# Altium PCB TPS40057 V2.0.PcbDoc
Units mil, origin at the board's own origin, x right, y up, seen from the top; angles counter-clockwise.
Board outline 1945 x 1510.79 mil, 2 copper layers (Top Layer, Bottom Layer); 29 components, 18 nets, 75 pads, 169 vias.
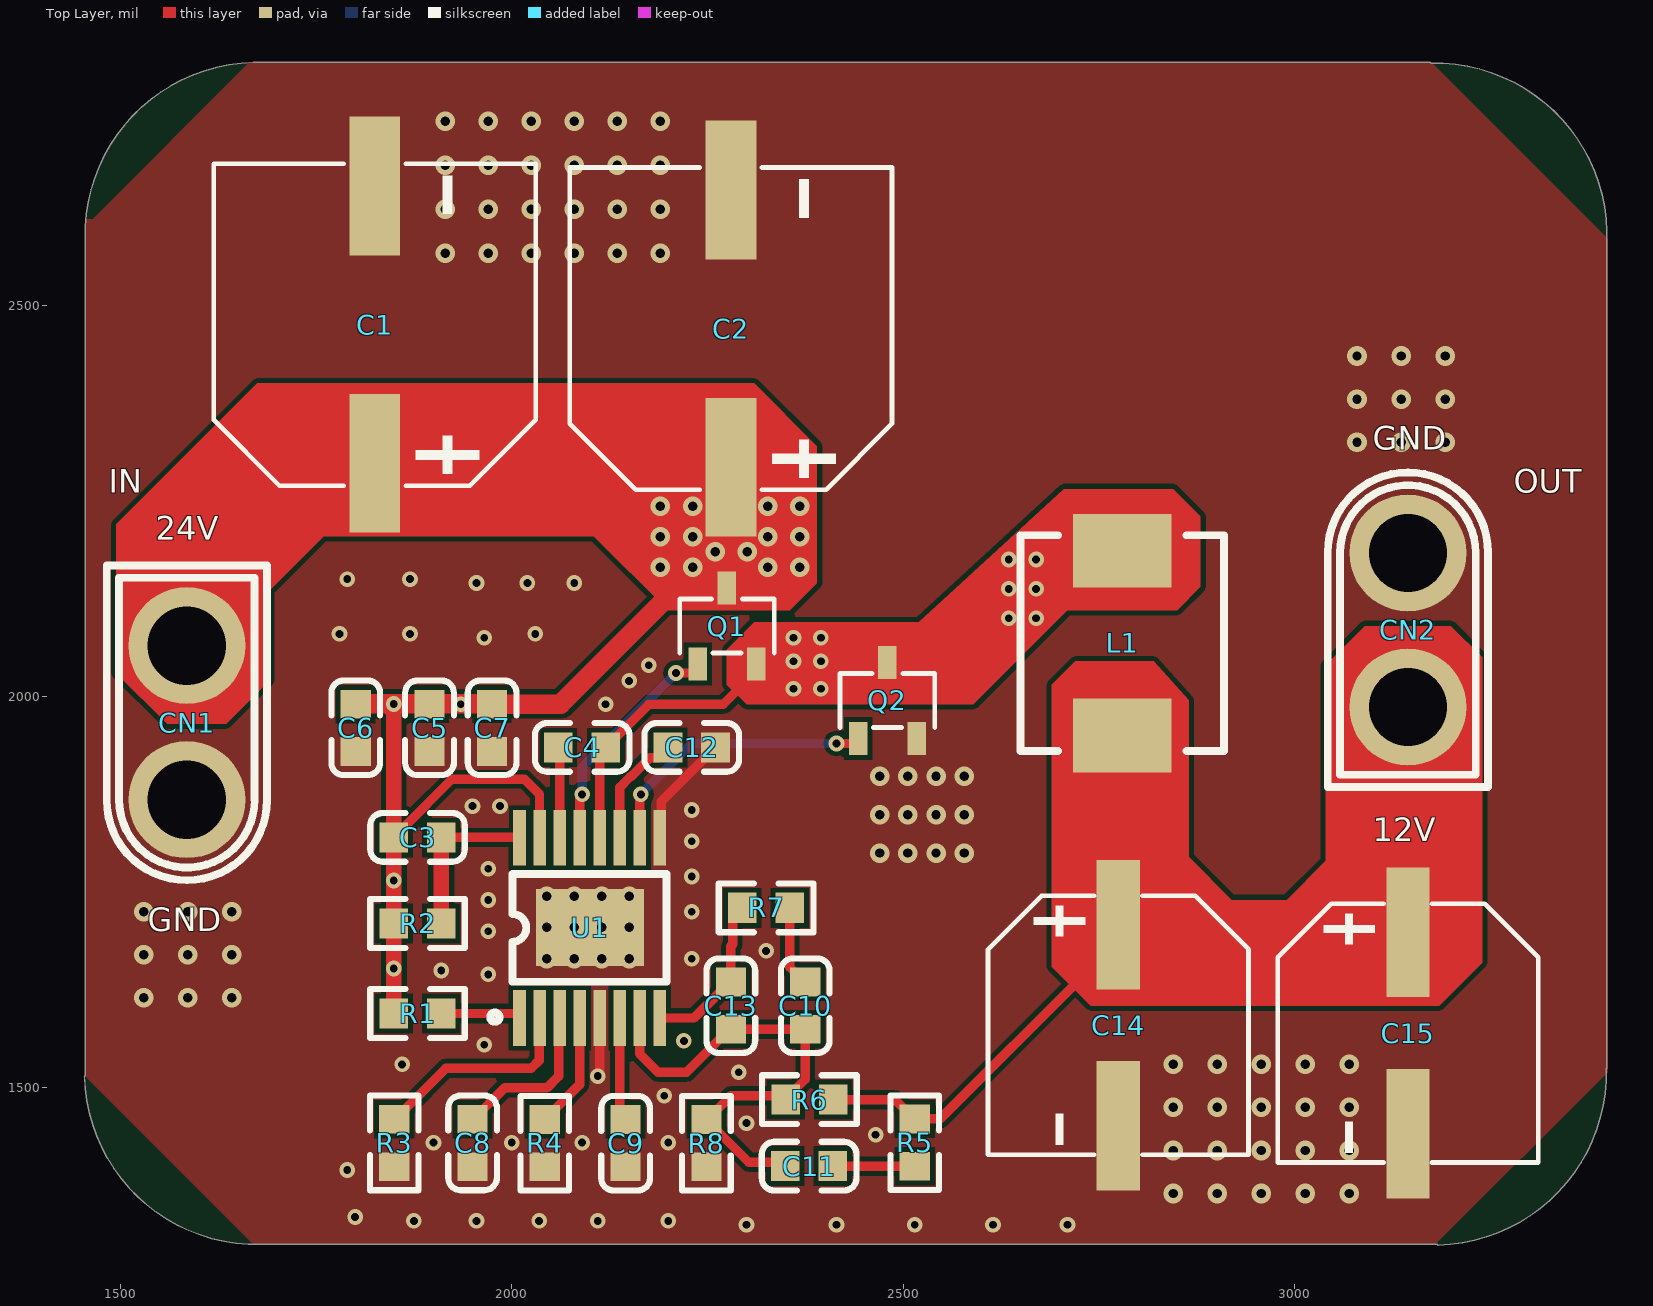
[diagram p0: Top Layer view]
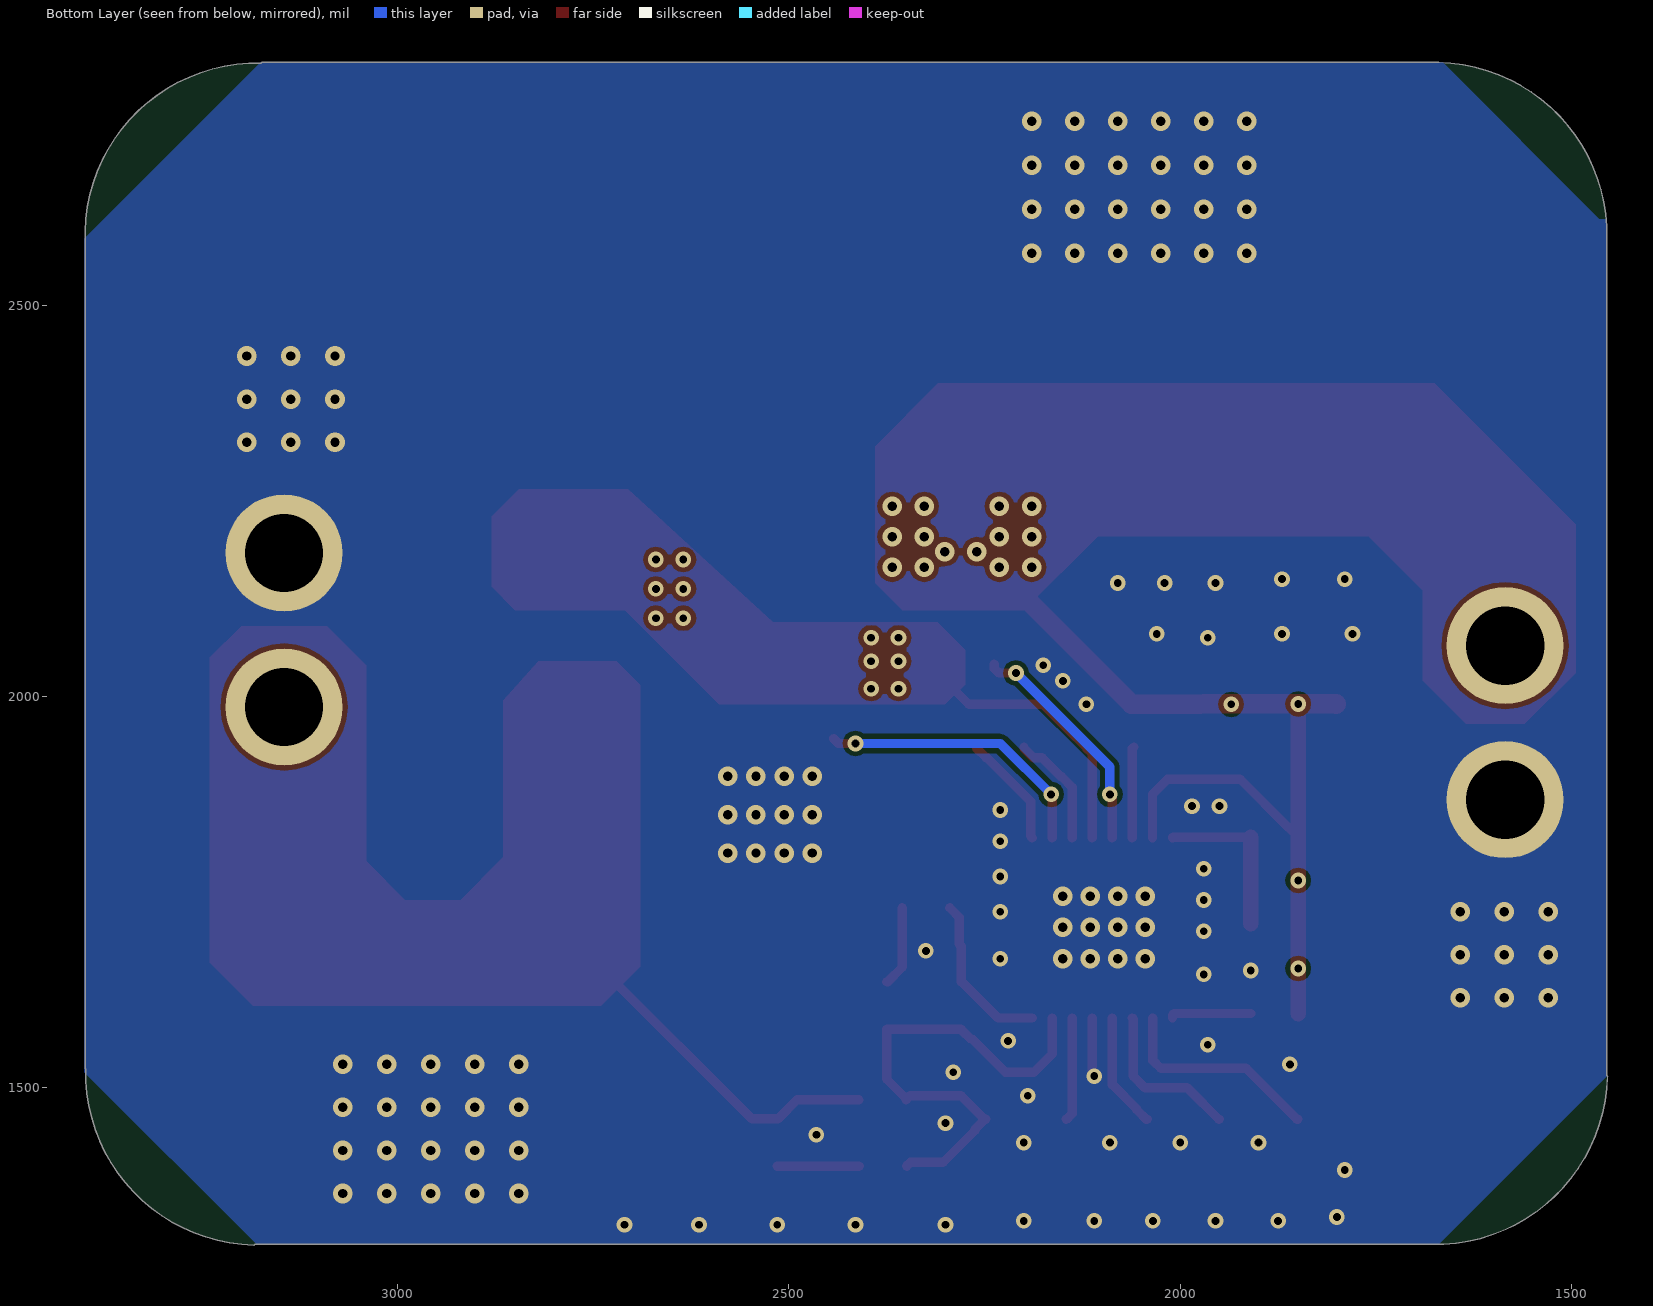
[diagram p1: Bottom Layer view, seen from below]
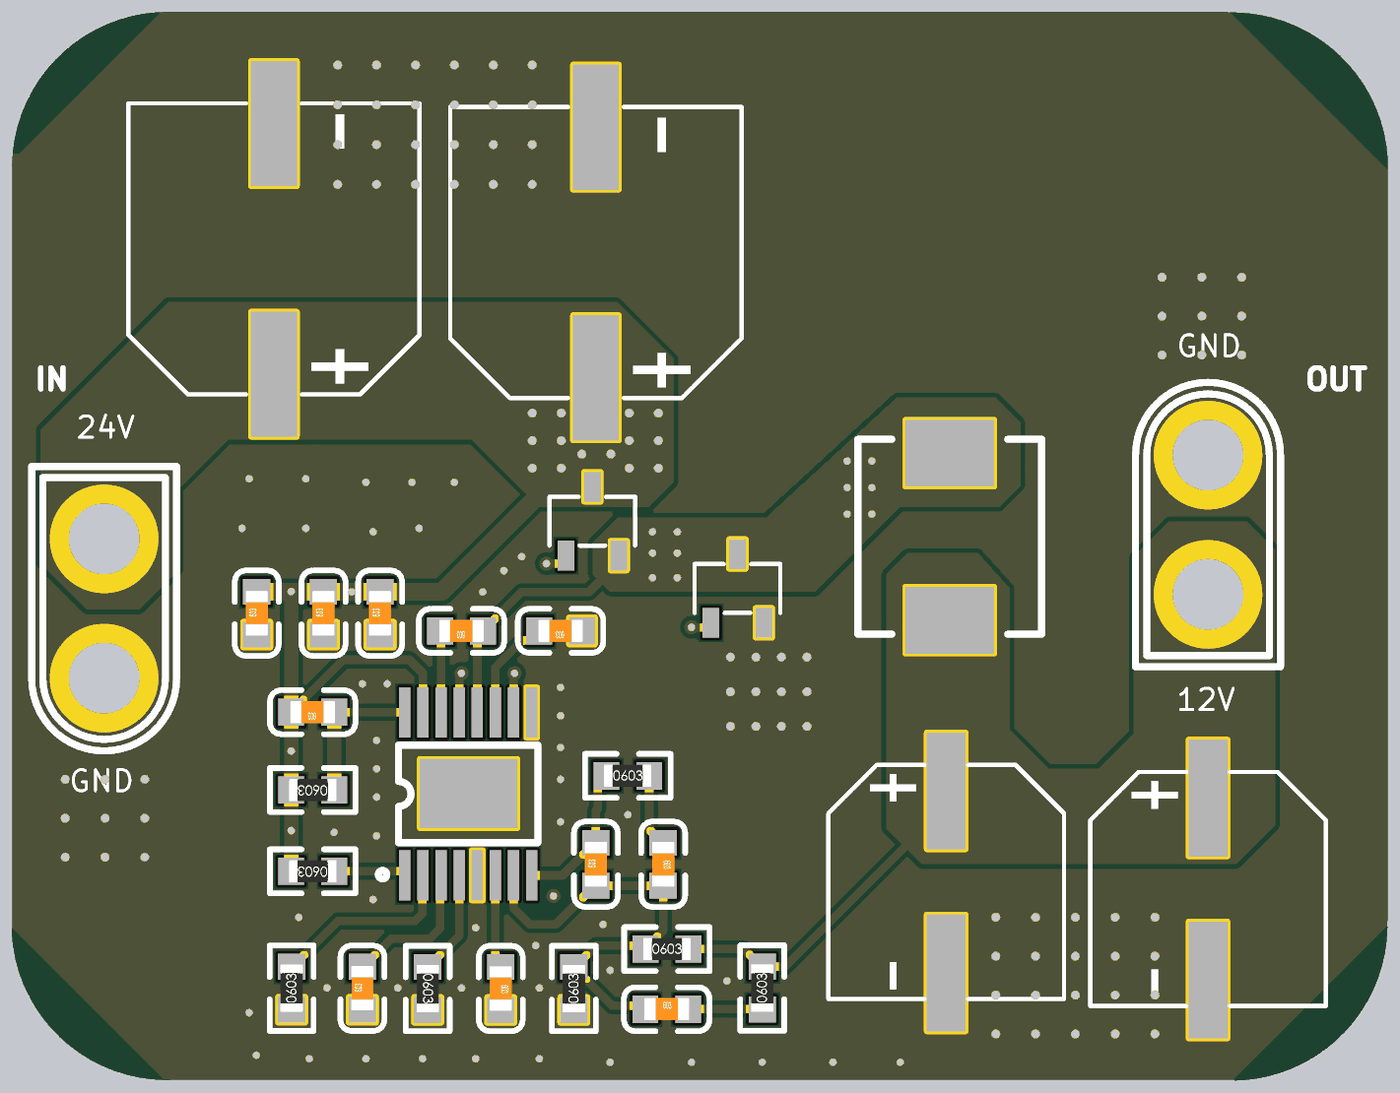
[diagram p2: 3D render of the assembled board from above, using the file's embedded part models]

## Layer stack, top to bottom
Top Solder: solder mask 0.4, Solder Resist, Dk 3.5
Top Layer: signal copper 1.4
Dielectric 1: dielectric 12.6, FR-4, Dk 4.8
Bottom Layer: signal copper 1.4
Bottom Solder: solder mask 0.4, Solder Resist, Dk 3.5

## Board outline
1455,1515.79 1455,2585 cw(c1675,2590) 1670,2810 3173.43,2810 3174.21,2809.21 cw(c3179.21,2589.21) 3399.21,2594.21 3399.21,1525 3398.43,1524.21 cw(c3178.43,1519.21) 3183.43,1299.21 3182.64,1300 1679.21,1300 cw(c1674.21,1520)

## Design rules (kind name [scope] priority, off if disabled: settings)
Clearance [All] p1: gap=6 ignorepadtopadclearanceinfootprint=FALSE
PlaneClearance [All] p1: clearance=8
PlaneConnect [All] p1: planeconnectstyle=Direct reliefexpansion=20 reliefentries=4 reliefconductorwidth=10 reliefairgap=10
PolygonConnect [All] p1: connectstyle=Direct reliefconductorwidth=10 reliefentries=4 polygonreliefangle="90 Angle" airgapwidth=10
RoutingVias [All] p1: holewidth=25 width=12 viastyle="Through Hole" minholewidth=4 minwidth=4 maxholewidth=50 maxwidth=50
SilkToSolderMaskClearance [IsPad] p1: minsilkscreentomaskgap=2 clearancetoexposedcopper=TRUE
SolderMaskExpansion [All] p1: expansion=4 istentingtop=FALSE
Width [All] p1: maxlimit=60 minlimit=6 preferedwidth=12
27 further rules are at their usual default settings.

## Components (designator, comment, footprint, x,y, rotation, side; value= is the part's Value field where it differs from the comment)
C1 "330uF (107) ±20% 35V" CAP-SMD_BD10.0-L10.3-W10.3-LS11.3-FD 1825,2475 r90 top value=330uF
C2 "330uF (107) ±20% 35V" CAP-SMD_BD10.0-L10.3-W10.3-LS11.3-FD 2280,2470 r90 top value=330uF
C3 "100pF/0603/50V" 0603_C 1879.68,1820 r180 top
C4 "0.1uF/0603/50V" 0603_C 2090,1935 r180 top
C5 "1uF/0603/ 50V" 0603_C 1895,1960 r90 top
C6 "22uF /0603/50V" 0603_C 1800.67,1960 r90 top
C7 "22uF /0603/50V" 0603_C 1975,1960 r90 top
C8 "1uF /0603/ /50V" 0603_C 1950,1429.68 r90 top
C9 "3.3uF /0603/50V" 0603_C 2145.51,1429.33 r270 top
C10 "330pF/ 0603/50V" 0603_C 2375,1605 r270 top
C11 "330pF/0603/50V" 0603_C 2380,1400 r0 top
C12 "1uF/0603/50V" 0603_C 2230,1935 r180 top
C13 "50pF/0603/50V" 0603_C 2280,1605 r90 top
C14 "180uF (107) ±20% 35V" CAP-SMD_BD8.0-L8.3-W8.3-FD 2775,1580 r270 top
C15 "180uF (107) ±20% 35V" CAP-SMD_BD8.0-L8.3-W8.3-FD 3145,1570 r270 top
CN1 "XT30 U-M" CONN-TH_XT30U-M 1585,1966.58 r270 top
CN2 "XT30 U-M" CONN-TH_XT30U-M 3145,2085 r90 top
L1 "3.3uH±10%" IND-SMD_L7.0-W6.6 2780,2186.22 r270 top
Q1 "ST3422A N道沟 SOT-23" SOT-23-3_L2.9-W1.6-P1.90-LS2.8-BR 2275,2090 r270 top
Q2 "ST3422A N道沟 SOT-23" SOT-23-3_L2.9-W1.6-P1.90-LS2.8-BR 2480,1995 r270 top
R1 "82KΩ /0603/±1%" 0603_R 1879.69,1595 r180 top
R2 "18KΩ/0603/±1%" 0603_R 1879.69,1710 r180 top
R3 "47KΩ/0603/±1%" 0603_R 1850,1429.68 r90 top
R4 "1KΩ /0603/ ±1%" 0603_R 2042.23,1429.33 r270 top
R5 "22KΩ/0603/±1%" 0603_R 2515,1430 r90 top
R6 "100KΩ/0603/±1%" 0603_R 2380.31,1485 r0 top
R7 "140KΩ / 0603/±1%" 0603_R 2325,1730 r0 top
R8 "6.2KΩ/0603/±1%" 0603_R 2248.79,1429.33 r90 top
U1 "TPS40057PWP" TSSOP-16_L5.0-W4.4-P0.65-LS6.4-BL-EP 2099.53,1704.42 r0 top

## Footprints (in the part's own frame and the unit in brackets; to place one, negate y for a bottom-side part, rotate by r counter-clockwise, add the part's x,y. Pads: shape width x height; smd on the part's side, far side on the other; paste and mask are expansions set on the pad)
0603_C [mm]
  rect 0.93x0.98 smd: 1(-0.77,0) 2(0.77,0)
  silkscreen extent -1.53,-0.79 1.54,0.79, body extent -0.8,-0.4 0.8,0.4, height 0.3
0603_R [mm]
  rect 0.93x0.98 smd: 1(-0.77,0) 2(0.77,0)
  silkscreen extent -1.53,-0.79 1.54,0.79, body extent -0.85,-0.4 0.85,0.4, height 0.56
CAP-SMD_BD8.0-L8.3-W8.3-FD [mm]
  rect 4.2x1.4 smd: 1(-3.267,0) 2(3.267,0)
  silkscreen extent -4.2,-4.23 4.2,4.23
CAP-SMD_BD10.0-L10.3-W10.3-LS11.3-FD [mm]
  rect 4.5x1.65 smd: 1(-4.5,0) 2(4.5,0)
  silkscreen extent -5.23,-5.23 5.23,5.23
CONN-TH_XT30U-M [mm]
  round 3.8 hole 2.54 paste+0 mask+0.05: 1(-2.5,0) 2(2.5,0)
  silkscreen extent -5.1,-2.6 5.11,2.6
IND-SMD_L7.0-W6.6 [mm]
  rect 2.4x3.2 smd: 1(0,0) 2(6,0)
  silkscreen extent -0.5,-3.3 6.5,3.3
SOT-23-3_L2.9-W1.6-P1.90-LS2.8-BR [mm]
  rect 1.07x0.6 smd: 1(1.235,-0.95) 2(1.235,0.95) 3(-1.235,0)
  silkscreen extent -0.88,-1.54 0.88,1.54, body extent -0.9,-1.55 0.9,1.55, height 1.25
TSSOP-16_L5.0-W4.4-P0.65-LS6.4-BL-EP [mil]
  rect 16x71 smd paste+0 mask+4: 1(-89.56,-115.16) 2(-63.97,-115.16) 3(-38.38,-115.16) 4(-12.8,-115.16) 5(12.8,-115.16) 6(38.39,-115.16) 7(63.98,-115.16) 8(89.57,-115.16) 9(89.57,115.16) 10(63.98,115.16) 11(38.39,115.16) 12(12.8,115.16) 13(-12.8,115.16) 14(-38.38,115.16) 15(-63.97,115.16) 16(-89.56,115.16)
  rect 138x98 smd paste+0 mask+4: 17(0.47,0.58)
  silkscreen extent -127,-120 98,69

## Part data
C1 C2: "电解电容", Equivalent Series Resistance(ESR)=-, JLCPCB Part Class="Extended Part", LCSC Part Name="330uF ±20% 35V", Lifetime @ Temp=2000hrs@105℃, Manufacturer=ROQANG(容强), Manufacturer Part=RVT1V331M1010, Operating Temperature=-45℃~+105℃, Rated Voltage=35V, Tolerance=±20%, Add into BOM=yes, Convert to PCB=yes, Datasheet=https://atta.szlcsc.com/upload/public/pdf/source/20170217/1487312292321.pdf, Device=RVT1V331M1010, L=10.2mm, Name=330uF, Ripple Current=-, Supplier=LCSC, Supplier Footprint=SMD,D10xL10.2mm, Supplier Part=C72510, Symbol=RVT1V331M1010-C72510, φD=10mm
C3 C4 C5 C6 C7 C8 C9 C10 C11 C12 C13: library part "0603 22pF (220) 5% 50V", "贴片电容", Package=0603, SuppliersPartNumber=C1653, ComponentLink1Description=供应商链接, ComponentLink1URL=http://www.szlcsc.com/product/details_2005.html, Supplier=LC
C14 C15: "电解电容"
CN1 CN2: "模型插头轻量版锂电池插头"
L1: library part "0805 3.3uH10%", "贴片电感", Package=0805, SuppliersPartNumber=C51725, ComponentLink1Description=供应商链接, ComponentLink1URL=http://www.szlcsc.com/product/details_52738.html, Supplier=LC
Q1 Q2: library part "ST3422A N道沟  SOT-23", "MOS(场效应管)", Package=SOT-23, SuppliersPartNumber=C20917, ComponentLink1Description=供应商链接, ComponentLink1URL=http://www.szlcsc.com/product/details_21629.html, Supplier=LC
R1 R2 R3 R4 R5 R6 R7 R8: library part "0603 10KΩ (1002) 1%_1", "贴片电阻", Package=0603, SuppliersPartNumber=C25804, ComponentLink1Description=供应商链接, ComponentLink1URL=http://www.szlcsc.com/product/details_26547.html, Supplier=LC
U1: library part TPS40057PWPR, "电源IC", Input Voltage=8V~40V, JLCPCB Part Class="Extended Part", LCSC Part Name="降压型 8V~40V 1MHz", Manufacturer=TI(德州仪器), Operating Temperature=-40℃~+85℃@(TA), Switching Frequency=1MHz, Add into BOM=yes, Convert to PCB=yes, Datasheet=https://www.ti.com/cn/lit/gpn/tps40054, Device=TPS40057PWP, Duty Cycle (Max)=94%, Function=降压型, Manufacturer Part=TPS40057PWP, Name=TPS40057PWP, Number of Outputs=1, Supplier=LCSC, Supplier Footprint=TSSOP-16-EP, Supplier Part=C1529919, Symbol=TPS40057PWP, Synchronous Rectification=是, Topology=降压式

## Via types
v1: diameter 25, hole 12, Top Layer to Bottom Layer, tented both sides, 100 vias
v2: diameter 20, hole 10, Top Layer to Bottom Layer, tented both sides, 69 vias

## Nets (pads, with @x,y where several pads share a name; then routed paths per layer and width w, separated by ;. In a path a pad name is that pad's centre, name@x,y a point inside that pad or via, vN(x,y) a via of type N, cw(c..) or ccw(c..) an arc to the next point about the centre after c; other vN are vias at no path point)
12V: C14.1 C15.1 CN2.1 L1.2 R5.2 R6.2 | length 499.5
  Top Layer w12: R6.2 2489.33,1485 2514.02,1460.32 2547.33,1460.32 2736.47,1649.46 2753.44,1649.46 2775,1671.02 C14.1
24V: C1.1 C2.1 C3.2 C5.2 C6.2 C7.2 CN1.1 Q1.3 R1.2 R2.2 U1.15 | length 1180.8
  Top Layer w12: C3.2 1849.37,1820.98 1861.68,1833.29 1862.66,1833.29 1923.54,1894.17 2016.39,1894.17 2035.56,1875 U1.15
  Top Layer w20: v2@1840,1990.47 1849.37,1981.1 C3.2@1849.37,1820.98 ; R1.2 v2(1849.37,1652.5) R2.2 v2(1849.37,1765) C3.2
  Top Layer w25: C6.2 1800.83,1990.47 1840,1990.47 v2(1849.37,1990.47) 1895,1990.47 1935,1990.47 1969.84,1990.47 C7.2@1970,1990.63 ; C7.2 2062.62,1990.32 2231.08,2158.78 v1(2231.08,2165)
  other v1: 2190,2165 2327.16,2165 2368.23,2165 2260,2185 2301.08,2185 2190,2203.94 2231.08,2203.94 2327.16,2203.94 2368.23,2203.94 2190,2242.88 2231.08,2242.88 2327.16,2242.88 2368.23,2242.88
  other v2: 1935,1990
GND: C1.2 C2.2 C5.1 C6.1 C7.1 C8.1 C9.2 C12.1 C14.2 C15.2 CN1.2 CN2.2 Q2.2 R3.1 R4.2 R8.1 U1.5 U1.9 U1.17 | length 220.7
  Top Layer w12: v2(2110,1515) 2112.33,1517.33 U1.5 ; U1.9 2191.1,1821.58 2191.1,1865.79 2247.02,1921.71 2248.01,1921.71 2260.32,1934.02 C12.1
  other v1: 2845,1365 2901.25,1365 2957.5,1365 3013.75,1365 3070,1365 2845,1420 2901.25,1420 2957.5,1420 3013.75,1420 3070,1420 2845,1475 2901.25,1475 2957.5,1475 3013.75,1475 3070,1475 2845,1530 2901.25,1530 2957.5,1530 3013.75,1530 3070,1530 1530,1615 1586.25,1615 1642.5,1615 2045,1665 2080,1665 2115,1665 2150,1665 1530,1670 1586.25,1670 1642.5,1670 2045,1705 2080,1705 2115,1705 2150,1705 1530,1725 1586.25,1725 1642.5,1725 2045,1745 2080,1745 2115,1745 2150,1745 2470,1800 2506.08,1800 2542.16,1800 2578.23,1800 2470,1848.94 2506.08,1848.94 2542.16,1848.94 2578.23,1848.94 2470,1897.88 2506.08,1897.88 2542.16,1897.88 2578.23,1897.88 3080,2325 3136.25,2325 3192.5,2325 3080,2380 3136.25,2380 3192.5,2380 3080,2435 3136.25,2435 3192.5,2435 1915,2566.25 1970,2566.25 2025,2566.25 2080,2566.25 2135,2566.25 2190,2566.25 1915,2622.5 1970,2622.5 2025,2622.5 2080,2622.5 2135,2622.5 2190,2622.5 1915,2678.75 1970,2678.75 2025,2678.75 2080,2678.75 2135,2678.75 2190,2678.75 1915,2735 1970,2735 2025,2735 2080,2735 2135,2735 2190,2735
  other v2: 2300,1325 2415,1325 2515,1325 2615,1325 2710,1325 1875,1330 1955,1330 2035,1330 2110,1330 2200,1330 1800,1335 1790,1395 1900,1430 2000,1430 2090,1430 2200,1430 2465,1440 2300,1455 2195,1490 2290,1520 1860,1530 1965,1555 2220,1560 1970,1645 1910,1650 2230,1665 2325,1675 1970,1700 2230,1725 1970,1740 2230,1770 1970,1780 2230,1815 2230,1855 1950,1860 1985,1860 2120,1990 2150,2020 2175,2040 1965,2075 1780,2080 1870,2080 2030,2080 1955,2145 2020,2145 2080,2145 1790,2150 1870,2150
NetC3_1: C3.1 R2.1 U1.16 | length 210.1
  Top Layer w12: C3.1 2009.55,1820 U1.16
  Top Layer w20: R2.1 C3.1
NetC4_1: C4.1 L1.1 Q1.2 Q2.3 U1.12 | length 360.9
  Top Layer w12: U1.12 2112.33,1927.02 C4.1 2120.32,1935.98 2132.62,1948.29 2133.61,1948.29 2175.32,1990 2270.28,1990 2312.4,2032.12 Q1.2
  other v2: 2360,2010 2395,2010 2360,2045 2395,2045 2360,2075 2395,2075 2635,2100 2670,2100 2635,2137.5 2670,2137.5 2635,2175 2670,2175
NetC4_2: C4.2 U1.14 | length 116
  Top Layer w12: C4.2 2061.15,1933.54 U1.14
NetC8_2: C8.2 U1.3 | length 207.5
  Top Layer w12: C8.2 1950.98,1460 1990.98,1500 2045,1500 2060,1515 2060,1588.11 U1.3
NetC9_1: C9.1 U1.6 | length 132.8
  Top Layer w12: U1.6 2137.92,1467.23 C9.1
NetC10_1: C10.1 R7.2 | length 103.4
  Top Layer w12: R7.2 2355.32,1654.02 2374.02,1635.32 C10.1
NetC10_2: C10.2 C11.1 C13.1 R6.1 R8.2 U1.7 | length 631
  Top Layer w12: U1.7 2163.51,1543.39 2186.9,1520 2223.38,1520 2265.76,1562.38 2267.69,1562.38 C13.1 C10.2 2375,1510.98 2350,1485.98 R6.1 2345.13,1489.87 2280,1489.87 R8.2@2249.77,1459.65 ; R8.2 R8.2@2249.77,1459.65 ; C11.1 2344.68,1405 2302.92,1405 2262.08,1445.84 2262.08,1447.34 R8.2@2249.77,1459.65
NetC11_2: C11.2 R5.1 | length 104.8
  Top Layer w12: C11.2 2514.69,1400 R5.1
NetC12_2: C12.2 U1.11 | length 147.8
  Top Layer w12: U1.11 2137.92,1883.86 2151.45,1897.39 2152.28,1897.39 2176.6,1921.71 2187.38,1921.71 2199.68,1934.02 C12.2
NetC13_2: C13.2 R7.1 U1.8 | length 210.7
  Top Layer w12: U1.8 2232.96,1589.26 2279.02,1635.32 C13.2 2280,1680.98 2282.38,1683.35 2282.38,1717.69 R7.1
NetQ1_1: Q1.1 U1.13 | length 297
  Top Layer w12: U1.13 2086.74,1871.74 v2(2090,1875) ; v2(2210,2030) 2231.79,2030 2237.6,2035.81 Q1.1
  Bottom Layer w12: v2(2090,1875) 2090,1910 v2(2210,2030)
NetQ2_1: Q2.1 U1.10 | length 363.5
  Top Layer w12: U1.10 2163.51,1873.51 v2(2165,1875) ; v2(2415,1940) 2436.79,1940 2442.6,1945.81 Q2.1
  Bottom Layer w12: v2(2165,1875) 2230,1940 v2(2415,1940)
NetR1_1: R1.1 U1.1 | length 104.5
  Top Layer w12: R1.1 2007.97,1595 2009.97,1593 U1.1
NetR3_2: R3.2 U1.2 | length 270.6
  Top Layer w12: R3.2 1850.98,1460 1915.98,1525 2025,1525 2035,1535 2035,1588.7 U1.2
NetR4_1: R4.1 U1.4 | length 148.6
  Top Layer w12: R4.1 2043.21,1459.65 2055.52,1471.95 2055.52,1472.94 2086.74,1504.16 U1.4

## Polygon pours and split planes (outlines as drawn)
GND on Top Layer "GND_L01_P000" (solid, remove dead copper, pour order 0): 1665,2810 1465,2610 1455,2610 1455,1515 1670,1300 3180,1300 3400,1520 3400,2585 3175,2810
GND on Bottom Layer "GND_L02_P001" (solid, remove dead copper, pour order 1): 1665,2810 1465,2610 1455,2610 1455,1515 1670,1300 3180,1300 3400,1520 3400,2585 3175,2810

## Other copper
Top Layer:
  region net 24V: 1560,1965 1495,2030 1495,2220 1675,2400 2310,2400 2390,2320 2390,2145 2355,2110 2200,2110 2105,2205 1760,2205 1690,2135 1690,2020 1635,1965
  region net 12V: 2720,2045 2690,2015 2690,1655 2740,1605 3185,1605 3240,1660 3240,2050 3200,2090 3090,2090 3040,2040 3040,1790 2990,1740 2920,1740 2865,1795 2865,1995 2820,2045
  region net NetC4_1: 2275,2060 2275,2015 2300,1990 2590,1990 2710,2110 2850,2110 2880,2140 2880,2230 2845,2265 2705,2265 2520,2095 2310,2095

## Silkscreen, mask and mechanical layers (free items; w line width, h text height)
Top Overlay:
  text "GND" at 3100,2315 h30
  text "IN" at 1485,2260 h30
  text "OUT" at 3280,2260 h30
  text "24V" at 1545,2200 h30
  text "12V" at 3100,1815 h30
  text "GND" at 1535,1700 h30
Top Paste:
  pour cut-out: 1880,1835 1875,1830 1875,1800 1880,1795 1880,1830 1885,1835
  pour cut-out: 1865,1795 1865,1735 1895,1735 1895,1795
Mechanical 1:
  lines w10: 1454.21,1515 ccw(c1674.21,1520) 1679.21,1300 3182.64,1300 ; 1455,1515.79 1455,2585 cw(c1675,2590) 1670,2810 3173.43,2810 ; 3174.21,2809.21 cw(c3179.21,2589.21) 3399.21,2594.21 3399.21,1525 ; 3183.43,1299.21 ccw(c3178.43,1519.21) 3398.43,1524.21